# Altium PCB PCB_Servo_Tester.PcbDoc
Units mm, origin at the board's own origin, x right, y up, seen from the top; angles counter-clockwise.
Board outline 30 x 35.1 mm, 2 copper layers (Top Layer, Bottom Layer); 19 components, 13 nets, 57 pads, 62 vias.
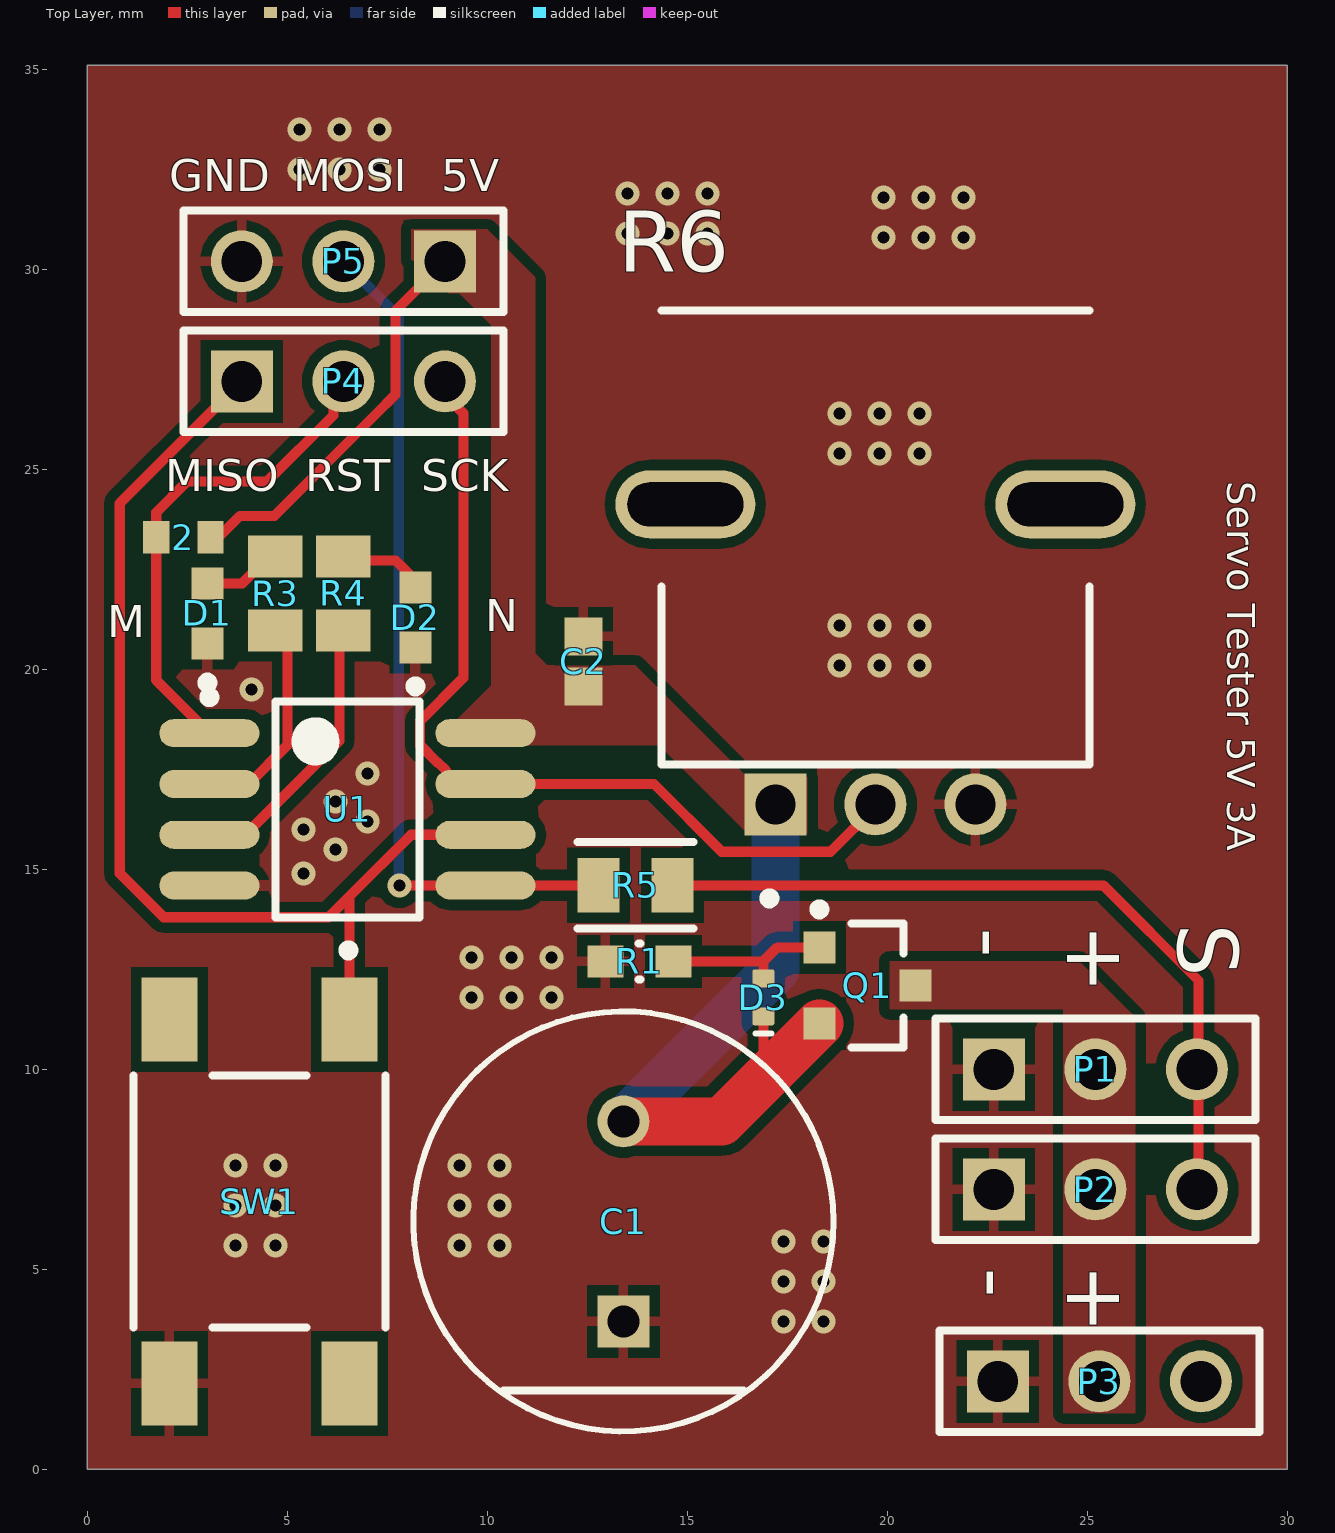
[diagram p0: Top Layer view]
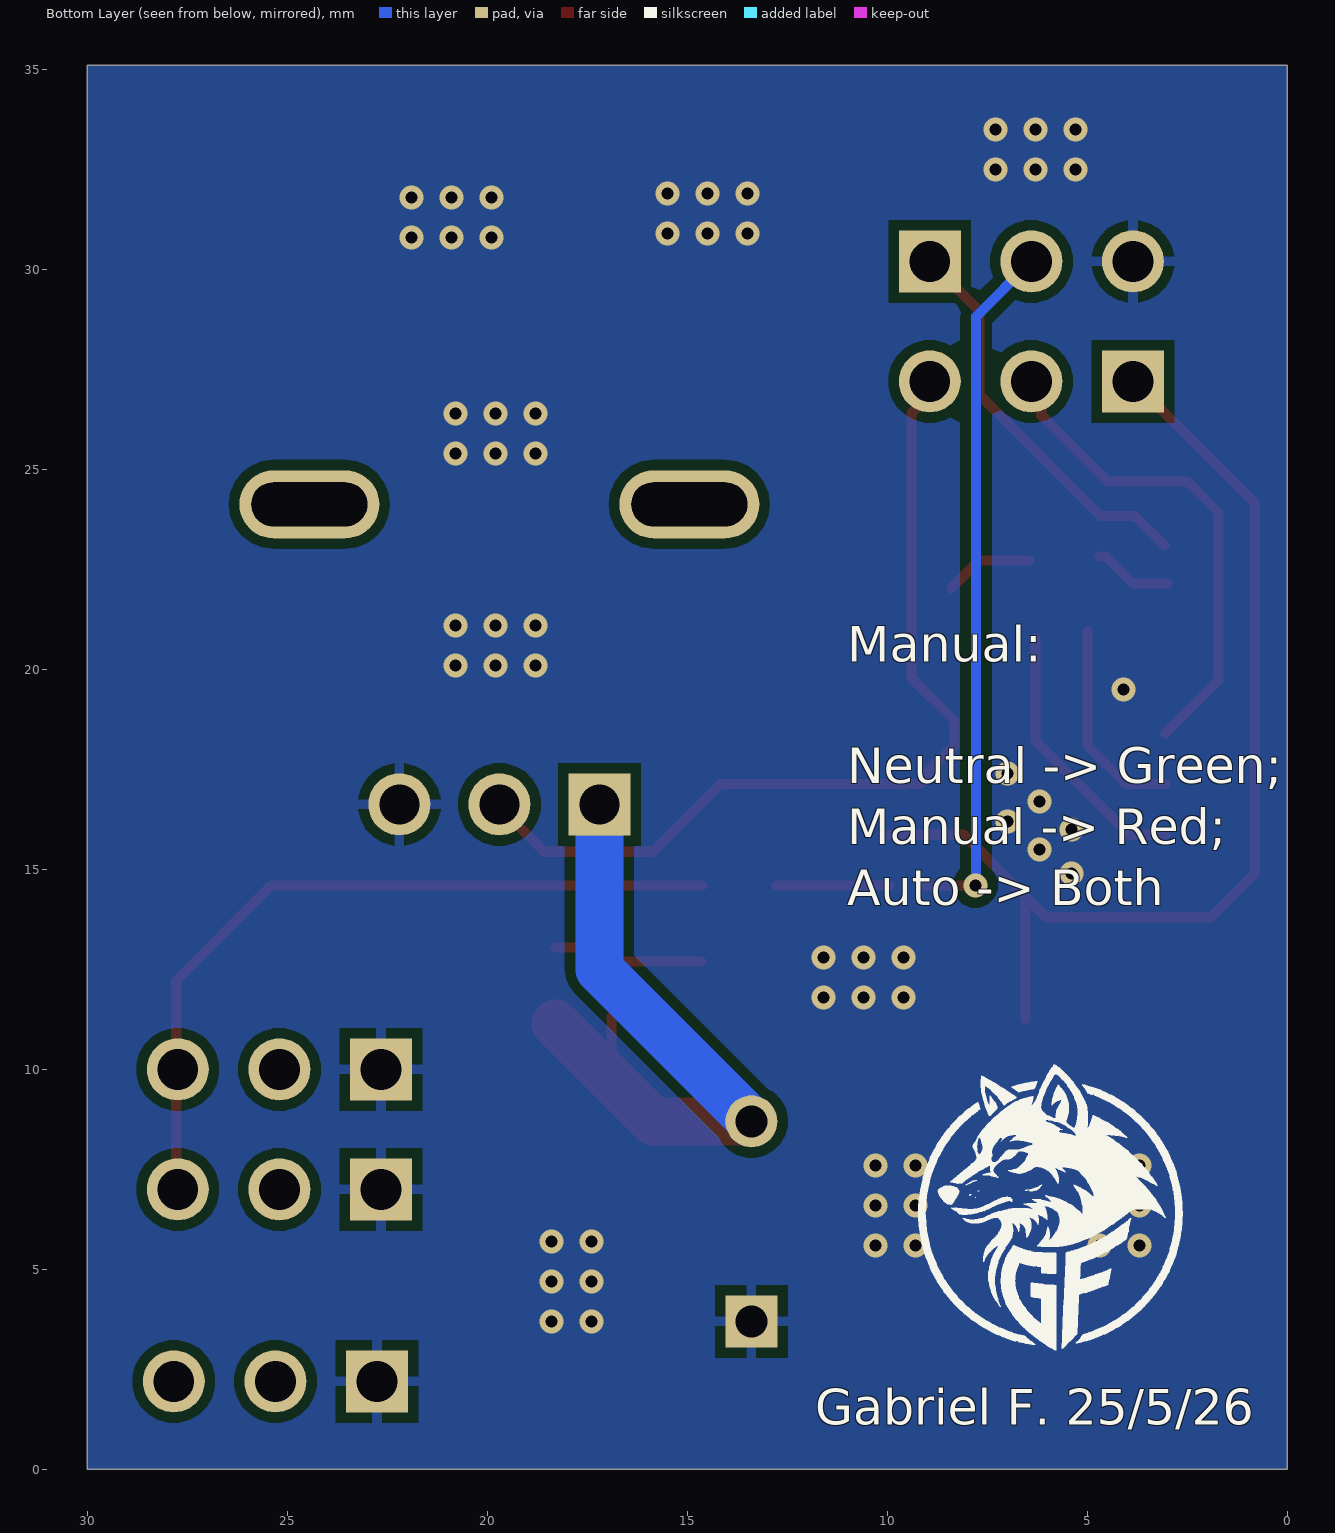
[diagram p1: Bottom Layer view, seen from below]
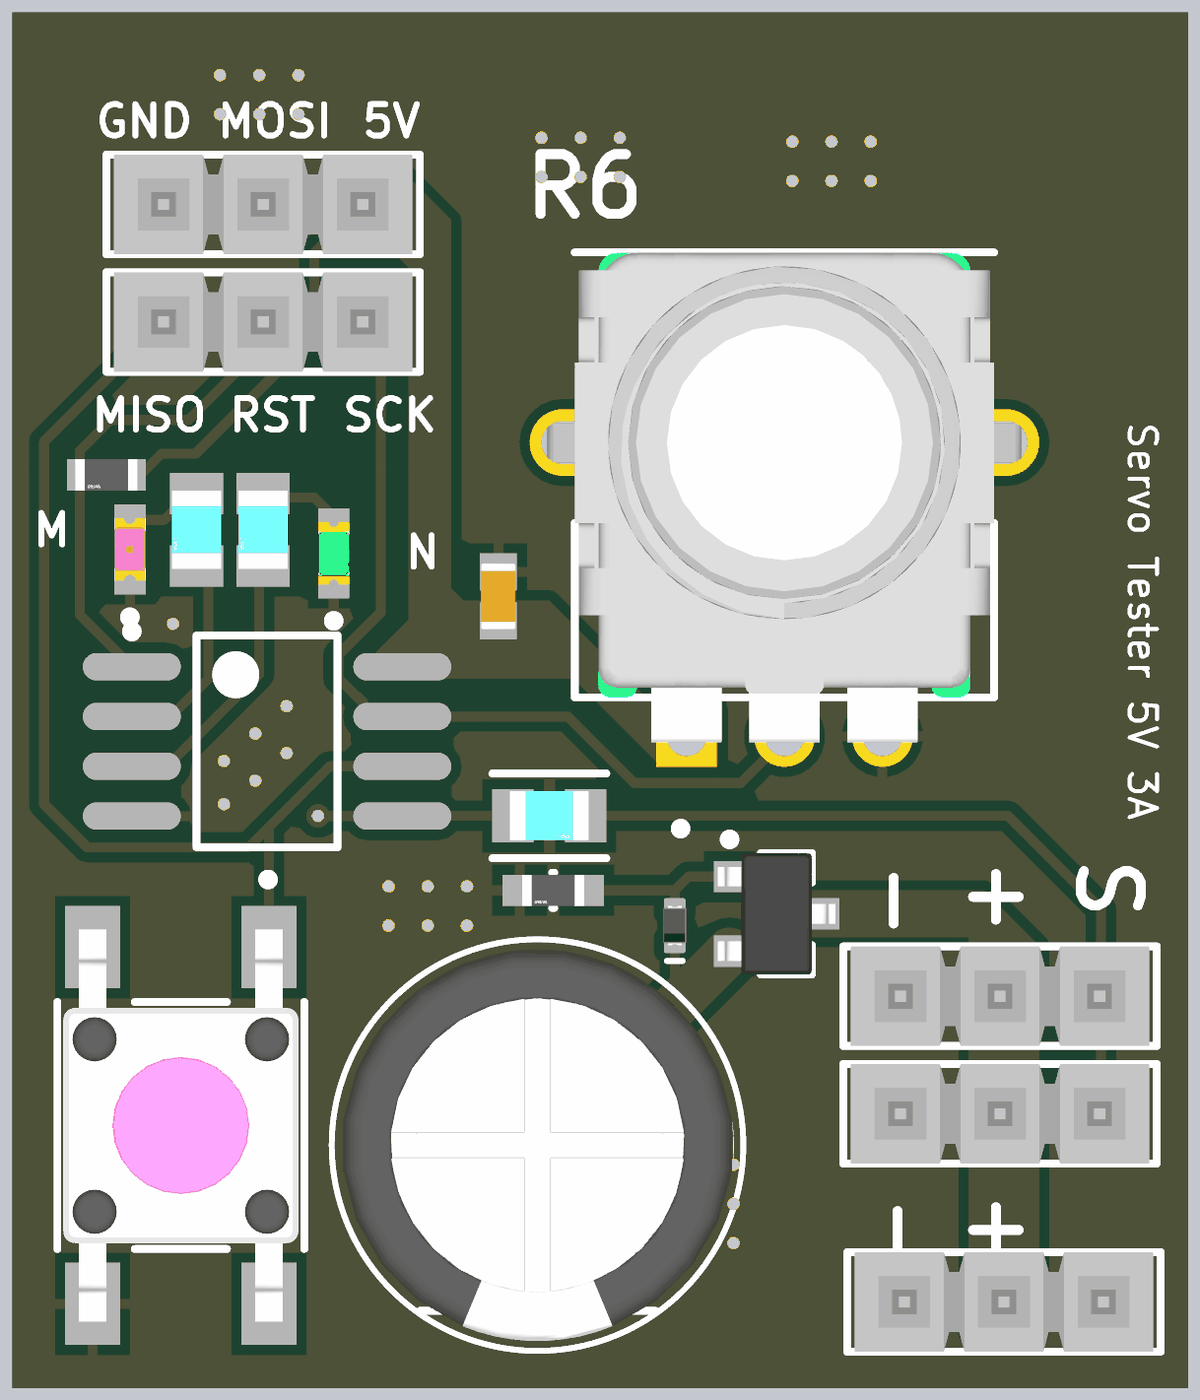
[diagram p2: 3D render of the assembled board from above, using the file's embedded part models]

## Layer stack, top to bottom
Top Solder: solder mask 0.0102, Solder Resist, Dk 3.5
Top Layer: signal copper 0.0356
Dielectric 1: dielectric 0.32, FR-4, Dk 4.8
Bottom Layer: signal copper 0.0356
Bottom Solder: solder mask 0.0102, Solder Resist, Dk 3.5

## Board outline
0,35.1 30,35.1 30,0 0,0

## Design rules (kind name [scope] priority, off if disabled: settings)
Clearance [All] p1: gap=0.254 ignorepadtopadclearanceinfootprint=FALSE
FabricationTestpoint [All] p1: side=3 testpointundercomponent=TRUE minsize=1.016 maxsize=2.54 preferedsize=1.524 minholesize=0 maxholesize=1.016 preferedholesize=0.813 testpointgrid=0.025 allowsidetop=TRUE allowsidebottom=TRUE usegrid=TRUE gridoriginx=0 gridoriginy=-63.3 gridtolerance=0
Height [All] p1: minheight=0 maxheight=40 prefheight=12.7
HoleSize [All] p1: absolutevalues=TRUE maxlimit=3 minlimit=0.025 maxpercent=80.000 minpercent=20.000
PolygonConnect PolygonConnect_7 [All vs IsNamedPolygon('+5_L01_P005')] p1: connectstyle=Direct reliefconductorwidth=0.254 reliefentries=4 polygonreliefangle="90 Angle" airgapwidth=0.254
PolygonConnect PolygonConnect_6 [All vs IsNamedPolygon('+5_L01_P005')] p2: connectstyle=Direct reliefconductorwidth=0.254 reliefentries=4 polygonreliefangle="90 Angle" airgapwidth=0.254
PolygonConnect PolygonConnect_5 [All vs IsNamedPolygon('+5_L02_P004')] p3: connectstyle=Direct reliefconductorwidth=0.254 reliefentries=4 polygonreliefangle="90 Angle" airgapwidth=0.254
PolygonConnect PolygonConnect_4 [All vs IsNamedPolygon('+5_L02_P004')] p4: connectstyle=Direct reliefconductorwidth=0.254 reliefentries=4 polygonreliefangle="90 Angle" airgapwidth=0.254
PolygonConnect PolygonConnect_3 [All vs IsNamedPolygon('+5_L01_P003')] p5: connectstyle=Direct reliefconductorwidth=0.254 reliefentries=4 polygonreliefangle="90 Angle" airgapwidth=0.254
PolygonConnect PolygonConnect_2 [All vs IsNamedPolygon('+5_L01_P003')] p6: connectstyle=Direct reliefconductorwidth=0.254 reliefentries=4 polygonreliefangle="90 Angle" airgapwidth=0.254
PolygonConnect PolygonConnect_1 [All vs IsNamedPolygon('VCC_L01_P000')] p7: connectstyle=Direct reliefconductorwidth=0.254 reliefentries=4 polygonreliefangle="90 Angle" airgapwidth=0.254
PolygonConnect [All] p8: connectstyle=Relief reliefconductorwidth=0.254 reliefentries=4 polygonreliefangle="90 Angle" airgapwidth=0.254
RoutingVias [All] p1: holewidth=0.3 width=0.6 viastyle="Through Hole" minholewidth=0.3 minwidth=0.6 maxholewidth=0.6 maxwidth=1
SilkToSolderMaskClearance [IsPad] p1: minsilkscreentomaskgap=0.05 clearancetoexposedcopper=TRUE
SolderMaskExpansion [All] p1: expansion=0 istentingtop=FALSE
SupplyNets "Schematic Supply Nets_2" [InNet('+5')] p1: voltage=0.000
SupplyNets "Schematic Supply Nets_1" [InNet('GND')] p2: voltage=0.000
SupplyNets "Schematic Supply Nets" [InNet('VCC')] p3: voltage=0.000
Width Width_1 [All] p1: maxlimit=1.5 minlimit=0.254 preferedwidth=0.254 minimp=50.000000 maximp=50.000000 favimp=50.000000
Width Width_VCC [InNet('VCC')] p2: maxlimit=1.5 minlimit=1.2 preferedwidth=1.5 minimp=50.000000 maximp=50.000000 favimp=50.000000
26 further rules are at their usual default settings.

## Components (designator, comment, footprint, x,y, rotation, side; value= is the part's Value field where it differs from the comment)
2 "10k" FP-RC0603-0_55-IPC_C 2.4,23.3 r180 top (schematic designator R2)
C1 "470muF" FP-RAD-TH-D_10_0_5-L_12_5-MFG 13.4,6.2 r90 top
C2 "Capacitor 100 nF +/-10% 50 V 0603" CAPC1608X90X40NL10T20 12.4,20.2 r270 top value=100nF
D1 "RED" FP-LTST-C191KRKT-MFG 3,21.4 r90 top
D2 "GREEN" FP-LTST-C191KGKT-MFG 8.2,21.3 r90 top
D3 "RB520CM-30" ROHM-VMN2-2_V 16.9,11.8 r90 top
P1 "TSW-103-07-F-S" SMTC-TSW-103-07-X-S 22.66,10 r0 top
P2 "TSW-103-07-F-S" SMTC-TSW-103-07-X-S 22.66,7 r0 top
P3 "TSW-103-07-F-S" SMTC-TSW-103-07-X-S 22.76,2.2 r0 top
P4 "TSW-103-07-F-S" SMTC-TSW-103-07-X-S 3.86,27.2 r0 top
P5 "TSW-103-07-F-S" SMTC-TSW-103-07-X-S 8.94,30.2 r180 top
Q1 "AO3401A" AO-SOT-23-3L_V 19.5,12.1 r0 top
R1 "100k" FP-RC0603-0_55-MFG 13.8,12.7 r180 top
R3 "330" FP-RK73H2A-IPC_B 4.7,21.9 r270 top
R4 "330" FP-RK73H2A-IPC_B 6.4,21.9 r270 top
R5 "330" FP-RK73H2A-IPC_B 13.7,14.6 r0 top
R6 "10k" FP-RK09L1140A2U-MFG 19.7,23.3 r0 top value=10kΩ
SW1 "SPST" FP-1-1977223-9-MFG 4.3,6.7 r0 top
U1 "ATtiny85-20SU" 8S2_M 6.5,16.5 r0 top

## Footprints (in the part's own frame and the unit in brackets; to place one, negate y for a bottom-side part, rotate by r counter-clockwise, add the part's x,y. Pads: shape width x height; smd on the part's side, far side on the other; paste and mask are expansions set on the pad)
8S2_M [mm] "SOP, 8-Leads, Body 5.3x5.3mm, Pitch 1.27mm, IPC Low Density"
  oval 2.5x0.7 smd: 1(-3.45,1.905) 2(-3.45,0.635) 3(-3.45,-0.635) 4(-3.45,-1.905) 5(3.45,-1.905) 6(3.45,-0.635) 7(3.45,0.635) 8(3.45,1.905)
  silkscreen extent -3.57,-2.7 1.8,2.93, body extent -2.7,-2.68 2.7,2.68, height 2.16
AO-SOT-23-3L_V [mm] "SOT23, 3-Leads, Body 3.1x1.8mm, Pitch 0.95mm"
  rect 0.8x0.8 smd: 1(-1.2,0.95) 2(-1.2,-0.95) 3(1.2,0)
  silkscreen extent -1.32,-1.55 0.9,2.02, body extent -1.5,-1.55 1.5,1.55, height 1.25
CAPC1608X90X40NL10T20 [mm] "Chip Capacitor, 2-Leads, Body 1.70x0.90mm, IPC Medium Density"
  rect 0.95x0.95 smd: 1(-0.625,0) 2(0.625,0)
  body extent -0.85,-0.45 0.85,0.45, height 0.9
FP-1-1977223-9-MFG [mm]
  rect 1.4x2.1 smd paste+0 mask+0: 1(2.25,4.55) 2(2.25,-4.55) 3(-2.25,4.55) 4(-2.25,-4.55)
  silkscreen extent -3.15,-3.15 3.15,6.4, body extent -3.25,-5.7 3.25,5.7, height 0.25
FP-LTST-C191KGKT-MFG [mm]
  rect 0.8x0.8 smd paste+0 mask+0: 1(-0.75,0) 2(0.75,0)
  silkscreen extent -1.85,-0.13 -1.6,0.12, body extent -1.25,-0.55 1.25,0.55, height 0.25
FP-LTST-C191KRKT-MFG [mm]
  rect 0.8x0.8 smd paste+0 mask+0: 1(-0.75,0) 2(0.75,0)
  silkscreen extent -1.86,-0.13 -1.61,0.12, body extent -1.25,-0.55 1.25,0.55, height 0.25
FP-RAD-TH-D_10_0_5-L_12_5-MFG [mm]
  rect 1.3x1.3 hole 0.8 paste-2539.97 mask+0: 1(-2.5,0)
  round 1.3 hole 0.8 paste-2539.97 mask+0: 2(2.5,0)
  silkscreen extent -5.25,-5.25 5.25,5.25, body extent -5.35,-5.35 5.35,5.35, height 0.25
FP-RC0603-0_55-IPC_C [mm]
  rect 0.659x0.812 smd paste+0 mask+0: 1(-0.677,0) 2(0.677,0)
  body extent -1.11,-0.55 1.11,0.55, height 0.25
FP-RC0603-0_55-MFG [mm]
  rect 0.9x0.8 smd paste+0 mask+0: 1(-0.85,0) 2(0.85,0)
  silkscreen extent -0.03,-0.45 0.03,0.45, body extent -1.4,-0.55 1.4,0.55, height 0.25
FP-RK09L1140A2U-MFG [mm]
  rect 1.55x1.55 hole 1 paste-2539.97 mask+0: 1(-2.5,-6.675)
  round 1.55 hole 1 paste-2539.97 mask+0: 2(0,-6.675) 3(2.5,-6.675)
  rrect100% 3.5x1.7 hole 1.1 slot 2.9 at 0 deg paste-2539.97 mask+0: 4(-4.75,0.825) 5(4.75,0.825)
  silkscreen extent -5.35,-9.15 5.35,5.68, body extent -6.6,-7.55 6.6,5.77, height 0.25
FP-RK73H2A-IPC_B [mm]
  rect 1.055x1.362 smd paste+0 mask+0: 1(-0.925,0) 2(0.925,0)
  body extent -1.7,-0.93 1.7,0.93, height 0.25
ROHM-VMN2-2_V [mm] "VMN2, 2-Leads, Body 0.9x0.6mm, Pitch 0.95mm"
  rrect25% 0.45x0.55 smd: 1(-0.475,0) 2(0.475,0)
  silkscreen extent -0.9,-0.2 -0.9,0.2, body extent -0.5,-0.3 0.5,0.3, height 0.37
SMTC-TSW-103-07-X-S [mm] ".025 SQ Post Terminal Strip Assembly, 1x3 Pins, Vertical, 2.54mm Pitch, Male"
  rect 1.55x1.55 hole 1.02: 1(0,0)
  round 1.55 hole 1.02: 2(2.54,0) 3(5.08,0)
  silkscreen extent -1.46,-1.27 6.54,1.27, body extent -1.27,-1.27 6.35,1.27, height 8.38

## Part data
2: library part CMP-2100-03664-2, "RES 10K OHM 1% 1/10W 0603", Case Code (Imperial)=0603, Case Code (Metric)=1608, Max Operating Temperature=155°C, Max Power Dissipation=100mW, Min Operating Temperature=-55°C, Resistance=10kR, Resistance Tolerance=1%, Resistor Type="Thick Film", Temperature Coefficient=100ppm/°C, Voltage Rating=75V, Voltage Rating (DC)=50V, Case/Package=0603, Construction=Rectangular, Depth=0.8mm, Features="Moisture Resistant", Height=0.45mm, Lead Free="Lead Free", Lead Pitch=0.3mm, Length=1.6mm, Military Standard=Not, Number of Pins=2, Number of Terminations=2, Packaging="Tape and Reel", Power Rating=100mW, RoHS Compliant=Yes, Series=RC, Size Code=0603, Termination=SMD/SMT, Tolerance=1%, Weight=7.1E-05oz, Width=0.8mm
C1: library part CMP-05427-001980-1, "Aluminum Electrolytic Capacitors (Radial Lead Type) 470uF ±20% 16V", Capacitance=470uF, Case/Package=Radial, ESR (Equivalent Series Resistance)=38mR, Max Operating Temperature=105°C, Min Operating Temperature=-40°C, Package Quantity=500, Ripple Current=1.29A, Tolerance=20%, Voltage Rating=16V, Diameter=10mm, Height=12.5mm, Height - Seated (Max)=0.551inch, Impedance=38mR, Lead Diameter=0.6mm, Lead Free="Lead Free", Lead Pitch=5mm, Length=12.5mm, Life (Hours)=4000Hour, Mount="Through Hole", Packaging="Tape and Reel", Radiation Hardening=No, RoHS Compliant=Yes, Series=FM, Termination=Radial, Voltage Rating (DC)=16V
C2: library part CMP-001-00017-6, "Chip Capacitor, 100 nF, +/- 10%, 50 V, 0603 (1608 Metric)", Capacitor Type=Ceramic, Case/Package=0603, Max Operating Temperature=125°C, Min Operating Temperature=-55°C, Tolerance=10%, Voltage Rating=50V, Mounting Technology=SM, Pins=2, RoHS Compliant=True
D1: library part CMP-2000-05199-2, Case Code (Imperial)=0603, Case Code (Metric)=1608, Color=Red, Current=2A, Forward Current=20mA, Forward Voltage=2V, Lens Color=Colorless, Max Operating Temperature=85°C, Min Operating Temperature=-55°C, Power Dissipation=75mW, Reverse Voltage=5V, Case/Package=0603, Depth=800µm, Dominant Wavelength=631nm, Height=550µm, Illumination Color=Red, Lead Free="Lead Free", Length=1.6mm, Lens Style=Clear, Lens Transparency=Clear, Luminous Intensity=54mcd, Mount="Surface Mount", NexarPartId=549908, Number of Elements=1, Number of LEDs=1, Number of Pins=2, Packaging="Tape and Reel", Power Rating=75mW, Radiation Hardening=No, RoHS=Compliant, Schedule B="8541402000, 8541402000", Test Current=20mA, Viewing Angle=130°, Voltage=2V, Wavelength=639nm, Width=800µm
D2: library part CMP-2000-05198-4, Case Code (Imperial)=0603, Case Code (Metric)=1608, Color=Green, Forward Current=20mA, Forward Voltage=2V, Lens Color="Clear, Colorless", Max Operating Temperature=85°C, Min Operating Temperature=-55°C, Power Dissipation=75mW, Reverse Voltage=5V, Case/Package=0603, Depth=800µm, Dominant Wavelength=571nm, Height=550µm, Illumination Color=Green, Lead Free="Lead Free", Length=1.6mm, Lens Style=Clear, Lens Transparency=Clear, Luminous Intensity=35mcd, Mount="Surface Mount", NexarPartId=549907, Number of Elements=1, Number of LEDs=1, Number of Pins=2, Packaging="Tape and Reel", Power Rating=75mW, Radiation Hardening=No, RoHS=Compliant, Schedule B="8541402000, 8541402000", Test Current=20mA, Viewing Angle=130°, Wavelength=574nm, Width=800µm
D3: library part CMP-004-00028-3, "DIODE SCHOTTKY 30V 100MA VMN2M", Case/Package=SMD/SMT, Mounting Technology=SMT, Pins=2
P1 P2 P3 P4 P5: library part CMP-1024-00331-1, "0.025\" SQ Post Header, Through-hole, Vertical, -55 to 125 degC, 2.54 mm Pitch, 3-Pin, Male, RoHS", Manufacturer=Samtec, Temperature Range="-55 to 125 degC", ComponentLink1Description="Manufacturer URL", ComponentLink1URL=http://www.samtec.com, ComponentLink2Description=Datasheet, ComponentLink2URL=http://www.samtec.com/documents/webfiles/pdf/TSW_TH.PDF, ComponentLink3Description="Package Specification", ComponentLink3URL=http://www.samtec.com/documents/webfiles/cpdf/TSW-XXX-XX-XXX-X-XX-XXX-MKT.pdf, DatasheetVersion=F-214, Mounting Technology=Through-hole, Orientation=Vertical, PackageDescription=".025[0.64] SQ. Post Terminal Strip Assembly", PackageReference=TSW-103-07-X-S, PackageVersion="DM, 8/1988", PartNumber=TSW-103-07-F-S, Pitch="2.54 mm", RoHS=True
Q1: library part CMP-2000-05778-1, "P-Channel MOSFET, 30 V, 4 A, -55 to 150 degC, 3-Pin SOT-23-3L, RoHS, Tape and Reel", Continuous Drain Current=4A, Drain-Source On-Volt=30V, Frequency (Max)=NotRequiredMHz, Gate-Source Voltage (Max)=?12V, Manufacturer="Alpha and Omega", Operating Temp Range=-55Cto150C, Operating Temperature Classification=Military, Output Power (Max)=NotRequiredW, Package Description="3-Pin Small Outline Transistor, Body 2.95 x 1.6 mm, Pitch 0.95 mm", Package Reference=SOT-23-3L, Package Type=SOT-23, Power Dissipation=1.4W, Power Gain=NotRequireddB, Channel Mode=Enhancement, Datasheet URL=http://www.aosmd.com/res/data_sheets/AO3401A.pdf, Datasheet Version="Rev. 3, 03/2011", Drain Current (Max)=4A, Drain Efficiency=NotRequired%, Drain-Source On-Res=0.044ohm, Manufacturer URL=http://www.aosmd.com/, Mounting=SurfaceMount, Mounting Technology=SurfaceMount, Noise Figure=NotRequireddB, Number of  Elements=1, Package URL=http://www.aosmd.com/res/packaging_information/SOT-23-3L.pdf, Pin Count=3, Polarity=P, Rad Hardened=No, Type=PowerMOSFET
R1: library part CMP-2100-03662-2, "RES SMD 100K OHM 1% 1/10W 0603", Case Code (Imperial)=0603, Case Code (Metric)=1608, Max Operating Temperature=155°C, Max Power Dissipation=100mW, Min Operating Temperature=-55°C, Resistance=100kR, Resistance Tolerance=1%, Resistor Type="Thick Film", Temperature Coefficient=100ppm/°C, Voltage Rating=50V, Working Voltage=75V, Case/Package=0603, Construction=Rectangular, Depth=0.8mm, Features="Moisture Resistant", Height=0.45mm, Lead Free="Lead Free", Length=1.6mm, Military Standard=Not, Number of Pins=2, Number of Terminations=2, Packaging="Tape and Reel", Power Rating=100mW, REACH SVHC="No SVHC", RoHS Compliant=Yes, Series=RC, Technology="THICK FILM", Termination=SMD/SMT, Tolerance=1%, Voltage Rating (DC)=50V, Width=0.8mm
R3 R4 R5: library part CMP-04015-086888-1, "330Ω ±1% 0.25W Chip Resistor 0805 Thick Film AEC-Q200 Qualified", Case Code (Imperial)=0805, Case Code (Metric)=2012, Max Operating Temperature=155°C, Min Operating Temperature=-55°C, Power Rating=125mW, Resistance=330R, Temperature Coefficient=100ppm/°C, Tolerance=1%, Voltage Rating=150V, Case/Package=0805, Lead Free="Lead Free", Packaging="Tape and Reel", RoHS Compliant=Yes, Series=RK73H, Termination=SMD/SMT
R6: library part CMP-24118-000002-1, "9mm Size Metal Shaft Snap-in Type RK09L Series", Manufacturer=ALPS, Manufacturer Part Number=RK09L1140A2U, Power Rating=0.05W, Resistance=10kΩ, Temperature="-10°C to +70°C", Temperature Range High=+70°C, Temperature Range Low=-10°C, Tolerance=20%, Voltage Rating=50V, Automotive=No, Category=Res, ComponentLink2Description=Datasheet, ComponentLink2URL=https://www.alps.com/prod/info/E/HTML/Potentiometer/RotaryPotentiometers/RK09L/RK09L1140A2U.html, Device Class L1="Passive Components", Device Class L2=Resistors, Device Class L3="Variable Resistors and Potentiometers", Height=30mm, Lead Free=Yes, Octopart=https://octopart.com/rk09l1140a2u-alps-7850070, Package=RK09L1140A2U, RoHS=TRUE, Series=RK09L, Standoff Height=2.55mm
SW1: library part CMP-03407-000015-1, "SWITCH TACTILE SPST-NO 0.05A 24V", Actuator Color=Pink, Case/Package=SMD/SMT, Current Rating=50mA, Max Operating Temperature=105°C, Max Voltage Rating (DC)=24V, Min Operating Temperature=-40°C, Operating Force=2.55N, Package Quantity=750, Actuator Material=Nylon, Actuator Type=Standard, Contact Material="Stainless Steel", Contact Plating=Silver, Depth=10mm, Illumination Type=Non-Illuminated, Length=6mm, Max Current Rating=50mA, Mechanical Life=1000000Cycles, Mount="Surface Mount", Orientation=Straight, Packaging=Bulk, Radiation Hardening=No, RoHS Compliant=Yes, Series=FSMJSMA, Switch Function=Off-Mom, Switch Travel=0.25mm, Termination="Gull Wing", Throw Configuration=SPST, Voltage Rating (DC)=24V
U1: library part CMP-0093-00173-2, "8-bit AVR Microcontroller, 20MHz, 2.7-5.5V, 8K Flash, 512 Bytes EEPROM, 512 Bytes SRAM, Industrial Grade (-40°C to 85°C), 8-Lead SOIC, Pb-Free", ComponentLink1Description="Manufacturer URL", ComponentLink1URL=http://www.atmel.com/, ComponentLink2Description="ATtiny25/45/85 Datasheet", ComponentLink2URL=http://www.atmel.com/dyn/resources/prod_documents/doc2586.pdf, ComponentLink3Description="ATtiny25/45/85 Summary", ComponentLink3URL=http://www.atmel.com/dyn/resources/prod_documents/2586S.pdf, DatasheetVersion="revN, Apr-2011", PackageDescription="8-Lead, 0.208\" Body, Plastic Small Outline Package (EIAJ)", PackageReference=8S2, PackageVersion="revF, Apr-2008", RevisionNote="DatasheetVersion updated. URLs added."

## Free pads (board coordinates)
  rect 1.362x1.055 smd paste+0 mask+0: 1(6.4,22.825) 2(6.4,20.975)

## Via types
v1: diameter 0.6, hole 0.3, Top Layer to Bottom Layer, tented both sides, 62 vias

## Nets (pads, with @x,y where several pads share a name; then routed paths per layer and width w, separated by ;. In a path a pad name is that pad's centre, name@x,y a point inside that pad or via, vN(x,y) a via of type N, cw(c..) or ccw(c..) an arc to the next point about the centre after c; other vN are vias at no path point)
+5: 2.1 C1.2 C2.2 D3.1 P5.1 Q1.2 R6.1 U1.8 | length 26.8
  Top Layer w0.254: 2.1@3.077,23.1 3.813,23.836 4.671,23.836 7.217,26.383 7.7,26.865 7.7,28.96 P5.1 ; D3.1 16.9,10.6 16.9,10.4 17.225,10.075
  Top Layer w1.2: C1.2 15.85,8.7 17.225,10.075 Q1.2
  Bottom Layer w1.2: C1.2 17.2,12.5 R6.1
GND: C1.1 C2.1 D1.1 D2.1 P1.1 P2.1 P3.1 P5.3 R1.2 R6.3 SW1.4 U1.4
  other v1: 17.4,3.7 18.4,3.7 17.4,4.7 18.4,4.7 3.7,5.6 4.7,5.6 9.3,5.6 10.3,5.6 17.4,5.7 18.4,5.7 3.7,6.6 4.7,6.6 9.3,6.6 10.3,6.6 3.7,7.6 4.7,7.6 9.3,7.6 10.3,7.6 9.6,11.8 10.6,11.8 11.6,11.8 9.6,12.8 10.6,12.8 11.6,12.8 5.4,14.9 6.2,15.5 5.4,16 7,16.2 6.2,16.7 7,17.4 4.1,19.5 18.8,20.1 19.8,20.1 20.8,20.1 18.8,21.1 19.8,21.1 20.8,21.1 18.8,25.4 19.8,25.4 20.8,25.4 18.8,26.4 19.8,26.4 20.8,26.4 19.9,30.8 20.9,30.8 21.9,30.8 13.5,30.9 14.5,30.9 15.5,30.9 19.9,31.8 20.9,31.8 21.9,31.8 13.5,31.9 14.5,31.9 15.5,31.9 5.3,32.5 6.3,32.5 7.3,32.5 5.3,33.5 6.3,33.5 7.3,33.5
LED_MANUAL: D1.2 R3.1 | length 2
  Top Layer w0.254: D1.2 3.871,22.15 4.547,22.825 R3.1
LED_NEUTRO: D2.2 pad.1 R4.1 | length 2.2
  Top Layer w0.254: R4.1@6.453,22.725 7.702,22.725 D2.2@8.4,22.027
MCU_RESET: 2.2 P4.2 U1.1 | length 12.5
  Top Layer w0.254: U1.1 1.723,19.732 1.723,23.1 1.723,23.923 2.5,24.7 4.5,24.7 6.152,26.352 6.152,26.952 P4.2
NetD3_2: D3.2 Q1.1 R1.1 | length 4.4
  Top Layer w0.254: R1.1 16.9,12.7 ; D3.2@16.8,12.273 16.898,12.175 D3.2@16.9,12.175 ; D3.2@16.9,12.273 16.9,12.7 ; Q1.1 17.25,13.05 16.9,12.7
PB0_MOSI: P5.2 R5.1 U1.5 | length 20.3
  Top Layer w0.254: v1(7.8,14.6) 7.802,14.597 9.025,14.597 U1.5@9.05,14.573 ; U1.5@9.955,14.6 R5.1
  Bottom Layer w0.254: P5.2 7.784,28.816 7.784,14.616 v1(7.8,14.6)
PB1_MISO: P4.1 SW1.1 U1.6 | length 27.1
  Top Layer w0.254: P4.1 0.811,24.151 0.811,14.9 1.91,13.802 6.03,13.802 6.55,14.322 ; SW1.1 6.55,14.322 ; U1.6 8.093,15.865 6.55,14.322
PB2_SCK: P4.3 R6.2 U1.7 | length 22.8
  Top Layer w0.254: P4.3 8.94,26.863 9.4,26.403 9.4,19.789 8.319,18.708 8.319,18.102 8.747,17.674 8.766,17.674 8.965,17.475 8.965,17.341 9.171,17.135 U1.7 14.165,17.135 15.861,15.439 18.579,15.439 R6.2@19.732,16.593
PB3: R3.2 U1.2 | length 5.2
  Top Layer w0.254: U1.2 4.035,17.135 5,18.1 R3.2@5,20.962
PB4: pad.2 R4.2 U1.3 | length 6.8
  Top Layer w0.254: U1.3 3.95,15.865 6.3,18.215 R4.2@6.3,20.775
PWM_OUT: P1.3 P2.3 R5.2 | length 19.2
  Top Layer w0.254: R5.2 25.4,14.6 27.78,12.22 P2.3@27.78,7.2
VCC: P1.2 P2.2 P3.2 Q1.3
pads on no net: P3.3 R6.4 R6.5 SW1.2 SW1.3

## Polygon pours and split planes (outlines as drawn)
GND on Top Layer "GND_L01_P007" (solid, remove dead copper, pour order 7): 0,0 30,0 30,35.1 0,35.1
+5 on Top Layer "+5_L01_P005" (solid, pour order 5): 18,17.3 16.5,17.3 13.7,20.1 11.5,20.1 11.2,20.4 11.2,29.8 10,31 8.1,31 8.1,29.5 8.2,29.4 9.3,29.4 10.1,28.6 10.1,19.6 9.1,18.6 9.1,18.1 14.3,18.1 16.5,15.9 18,15.9 16.5,15.9 18,15.9
VCC on Top Layer "VCC_L01_P000" (solid, pour order 0): 26.2,1.4 24.4,1.4 24.4,11.5 20.054,11.5 20.054,12.7 24.8,12.7 26.2,11.3
GND on Bottom Layer "GND_L02_P006" (solid, remove dead copper, pour order 6): 0,0 30,0 30,35.1 0,35.1 30,35.1 0,35.1

## Silkscreen, mask and mechanical layers (free items; w line width, h text height)
Top Overlay:
  text "GND" at 2.05,31.95 h0.8
  text "MOSI" at 5.15,31.95 h0.8
  text "5V" at 8.85,31.95 h0.8
  text "Servo Tester 5V 3A" at 28.5,24.7 h0.7 r270
  text "MISO" at 1.95,24.45 h0.8
  text "RST" at 5.45,24.45 h0.8
  text "SCK" at 8.35,24.45 h0.8
  text "N" at 9.95,20.95 h0.8
  text "M" at 0.5,20.8 h0.8
  text "+" at 24.5,13.646 h1.52 r270
  text "S" at 27.254,13.646 h1.52 r270
  text "-" at 21.892,13.546 h1.52 r270
  text "+" at 24.5,5.146 h1.52 r270
  text "-" at 21.992,5.046 h1.52 r270
Bottom Overlay:
  drawing of 16 lines, arcs and shapes, not listed
  text "Ás vezes ouço passar o vento; e só de ouvir o vento passar, vale a pena ter nascido." at 29.542,29.9 h1.52
  text "Manual: /   / Neutral -> Green;  / Manual -> Red;  / Auto -> Both" at 11,13.8 h1.52
  text "Gabriel F. 25/5/26" at 11.8,0.817 h1.52
Top Assembly:
  lines w0.2: 1.294,22.55 3.671,22.55 3.671,23.65 1.294,23.65 1.294,22.55 ; 2.45,19.85 3.55,19.85 3.55,22.35 2.45,22.35 2.45,19.85 ; 3.669,19.997 3.669,23.403 5.531,23.403 5.531,19.997 3.669,19.997 ; 5.369,19.997 5.369,23.403 7.231,23.403 7.231,19.997 5.369,19.997 ; 7.85,20.027 8.95,20.027 8.95,22.527 7.85,22.527 7.85,20.027
  text ".Designator" at 4.788,21.7 h1 r270
  text ".Designator" at 6.488,21.7 h1 r270
  text ".Designator" at 3.001,21.1 h1 r90
Top 3D Body:
  lines w0.2: 1.6,22.7 3.2,22.7 3.2,23.5 1.6,23.5 1.6,22.7 ; 2.55,20.25 3.45,20.25 3.45,21.95 2.55,21.95 2.55,20.25 ; 3.975,20.7 3.975,22.7 5.225,22.7 5.225,20.7 3.975,20.7 ; 5.675,20.7 5.675,22.7 6.925,22.7 6.925,20.7 5.675,20.7 ; 7.95,20.427 8.85,20.427 8.85,22.127 7.95,22.127 7.95,20.427
Top Courtyard:
  lines w0.2: 1.294,22.4 1.294,23.65 3.506,23.65 3.506,22.4 ; 2.45,19.85 3.55,19.85 3.55,22.35 2.45,22.35 2.45,19.85 ; 3.669,19.997 3.669,23.403 5.531,23.403 5.531,19.997 3.669,19.997 ; 5.369,19.997 5.369,23.403 7.231,23.403 7.231,19.997 5.369,19.997 ; 7.85,20.027 8.95,20.027 8.95,22.527 7.85,22.527 7.85,20.027
Top Component Center:
  lines w0.1: 1.9,23.1 2.9,23.1 ; 2.4,22.6 2.4,23.6 ; 2.5,21.1 3.5,21.1 ; 3,20.6 3,21.6 ; 4.1,21.7 5.1,21.7 ; 4.6,21.2 4.6,22.2 ; 5.8,21.7 6.8,21.7 ; 6.3,21.2 6.3,22.2 ; 7.9,21.277 8.9,21.277 ; 8.4,20.777 8.4,21.777